# Altium PCB reservoir_level_color.PcbDoc
Units mil, origin at the board's own origin, x right, y up, seen from the top; angles counter-clockwise.
Board outline 1505 x 8250 mil, 2 copper layers (Top Layer, Bottom Layer); 10 components, 15 nets, 78 pads, 23 vias.
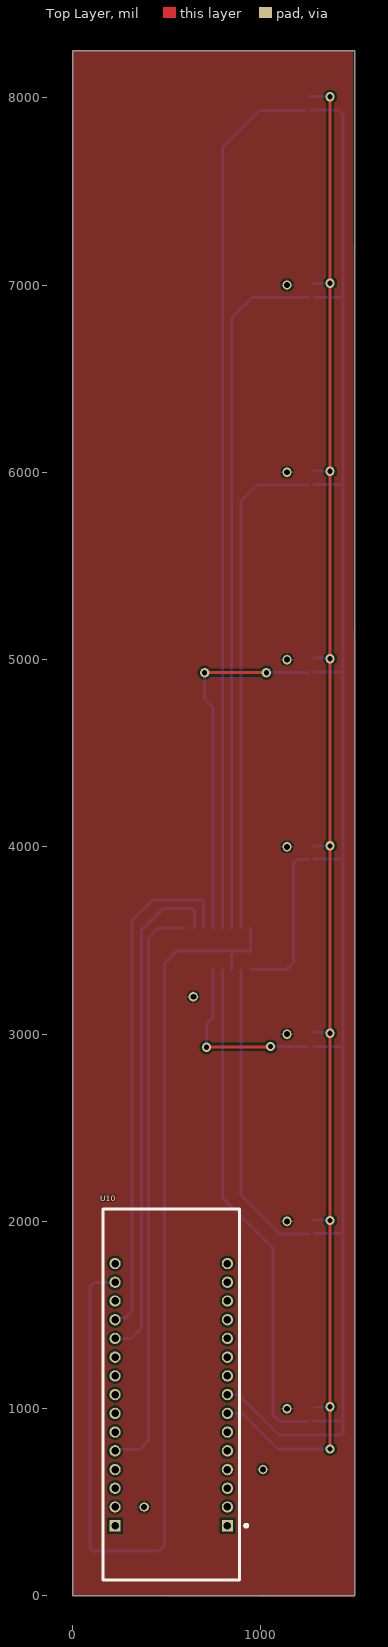
[diagram p0: Top Layer view]
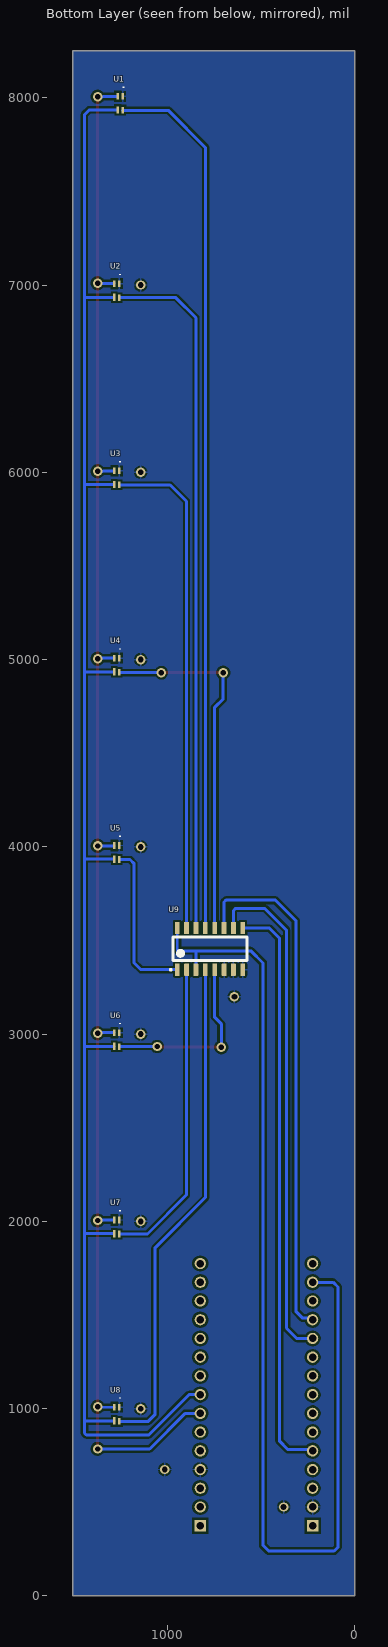
[diagram p1: Bottom Layer view, seen from below]

## Layer stack, top to bottom
Top Solder: solder mask 0.4, Solder Resist, Dk 3.5
Top Layer: signal copper 1.4
Dielectric 1: dielectric 12.6, FR-4, Dk 4.8
Bottom Layer: signal copper 1.4
Bottom Solder: solder mask 0.4, Solder Resist, Dk 3.5

## Board outline
0,0 1505,0 1505,8250 0,8250

## Design rules (kind name [scope] priority, off if disabled: settings)
Clearance [All] p1: gap=12 ignorepadtopadclearanceinfootprint=FALSE except(0: SMDPad-Hole THPad-Hole Via-Hole Fill-Hole Poly-Hole Region-Hole Text-Hole; 10: Arc-SMDPad Track-SMDPad SMDPad-SMDPad)
PolygonConnect [All] p1: connectstyle=Relief reliefconductorwidth=10 reliefentries=4 polygonreliefangle="90 Angle" airgapwidth=10
RoomDefinition reservoir_level_color [InComponentClass('reservoir_level_color')] p1: confinementstyle=ConfineIn formatcopy=TRUE lockcomponents=FALSE outline 0,0 1500.01,0 1500.01,8255 0,8255
RoutingVias [All] p1: holewidth=28 width=50 viastyle="Through Hole" minholewidth=28 minwidth=50 maxholewidth=28 maxwidth=50
SolderMaskExpansion [All] p1: expansion=4 istentingtop=FALSE
Width [All] p1: maxlimit=20 minlimit=12 preferedwidth=16 minimp=50.000000 maximp=50.000000 favimp=50.000000
30 further rules are at their usual default settings.

## Classes and differential pairs
component class reservoir_level_color: U2 U3 U4 U5 U6 U7 U8 U10

## Components (designator, comment, footprint, x,y, rotation, side; value= is the part's Value field where it differs from the comment)
U1 "VEML6040" VISHAY_VEML6040_1.25X2X1 1253,7970 r270 bottom
U2 "VEML6040" VISHAY_VEML6040_1.25X2X1 1270.72,6970 r270 bottom
U3 "VEML6040" VISHAY_VEML6040_1.25X2X1 1270.72,5970 r270 bottom
U4 "VEML6040" VISHAY_VEML6040_1.25X2X1 1270.72,4970 r270 bottom
U5 "VEML6040" VISHAY_VEML6040_1.25X2X1 1270.72,3970 r270 bottom
U6 "VEML6040" VISHAY_VEML6040_1.25X2X1 1270.72,2970 r270 bottom
U7 "VEML6040" VISHAY_VEML6040_1.25X2X1 1270.72,1970 r270 bottom
U8 "VEML6040" VISHAY_VEML6040_1.25X2X1 1270.72,970 r270 bottom
U9 "SN74LV4051ADR" D0016A_M 773,3455 r90 bottom
U10 "NUCLEO-F303K8" MODULE_NUCLEO-F303K8 525,1075 r180 top

## Footprints (in the part's own frame and the unit in brackets; to place one, negate y for a bottom-side part, rotate by r counter-clockwise, add the part's x,y. Pads: shape width x height; smd on the part's side, far side on the other; paste and mask are expansions set on the pad)
D0016A_M [mm] "SOIC, 16-Leads, Body 10x4mm, Pitch 1.27mm, IPC Low Density"
  rrect15% 1.65x0.65 smd: 1(-2.825,4.445) 2(-2.825,3.175) 3(-2.825,1.905) 4(-2.825,0.635) 5(-2.825,-0.635) 6(-2.825,-1.905) 7(-2.825,-3.175) 8(-2.825,-4.445) 9(2.825,-4.445) 10(2.825,-3.175) 11(2.825,-1.905) 12(2.825,-0.635) 13(2.825,0.635) 14(2.825,1.905) 15(2.825,3.175) 16(2.825,4.445)
  silkscreen extent -2.95,-5 1.6,5.45, body extent -3,-4.95 3,4.95, height 1.59
MODULE_NUCLEO-F303K8 [mm]
  rect 1.53x1.53 hole 1.02: 3_1(-7.62,17.78) 4_1(7.62,17.78)
  round 1.53 hole 1.02: 3_2(-7.62,15.24) 3_3(-7.62,12.7) 3_4(-7.62,10.16) 3_5(-7.62,7.62) 3_6(-7.62,5.08) 3_7(-7.62,2.54) 3_8(-7.62,0) 3_9(-7.62,-2.54) 3_10(-7.62,-5.08) 3_11(-7.62,-7.62) 3_12(-7.62,-10.16) 3_13(-7.62,-12.7) 3_14(-7.62,-15.24) 3_15(-7.62,-17.78) 4_2(7.62,15.24) 4_3(7.62,12.7) 4_4(7.62,10.16) 4_5(7.62,7.62) 4_6(7.62,5.08) 4_7(7.62,2.54) 4_8(7.62,0) 4_9(7.62,-2.54) 4_10(7.62,-5.08) 4_11(7.62,-7.62) 4_12(7.62,-10.16) 4_13(7.62,-12.7) 4_14(7.62,-15.24) 4_15(7.62,-17.78)
  silkscreen extent -10.36,-25.14 9.27,25.14
VISHAY_VEML6040_1.25X2X1 [mm]
  rect 0.9x0.35 smd: 1(-0.95,0.35) 2(-0.95,-0.35) 4(0.95,0.35)
  rect 1x0.35 smd: 3(0.9,-0.35)
  silkscreen extent -2.25,0.4 -2.15,0.5

## Part data
U1 U2 U3 U4 U5 U6 U7 U8: "<b>VEML6040</b>  <p> RGBW Color Sensor with I2C Interface: <ul>   VEML6040 color sensor senses red, green, blue, and white light and incorporates photodiodes, amplifiers, and analog / digital circuits into a single chip using CMOS process. With the color sensor applied, the brightness, and color temperature of backlight can be adjusted base on ambient light source that makes panel looks more comfortable for end userâ€™s eyes. VEML6040â€™s adoption of FiltronTM technology achieves the closest ambient light spectral sensitivity to real human eye responses.  <ul> Device Model created 15.06.2016 by Johannes Kolb - Vishay Semiconductor GmbH", Package=None, Availability=Unavailable, MF="{'manufacturer': u'Vishay'}", MP=VEML6040, Price=None
U9: library part CMP-0802-00006-4, "8-Channel Analog Multiplexer/Demultiplexer, D0016A, LARGE T&R", Generic Part Number=SN74LV4051A, Manufacturer="Texas Instruments", Operating Temperature Range(C)="-40 to 85", Rating=Catalog, Bandwidth(Max)(MHz)=35, Code_JEDEC="MS-012 variation AC", Configuration="1 X 1：8 MUX", Crosstalk=Yes, DatasheetVersion=SCLS428H, Output Type=CMOS, PackageReference=D0016A, PackageVersion=http://www.ti.com/lit/ml/mpds178g/mpds178g.pdf, Ron(Max)(Ohms)=75, Ron(Typ)(Ohms)=22, VCC(Max)(V)=5.5, VCC(Min)(V)=2
U10: Package=None, Availability=Unavailable, MF="{'manufacturer': u'STMicroelectronics'}", MP=NUCLEO-F303K8, Price=None

## Via types
v1: diameter 50, hole 28, Top Layer to Bottom Layer, 13 vias
v2: diameter 50, hole 31, Top Layer to Bottom Layer, 10 vias

## Nets (pads, with @x,y where several pads share a name; then routed paths per layer and width w, separated by ;. In a path a pad name is that pad's centre, name@x,y a point inside that pad or via, vN(x,y) a via of type N, cw(c..) or ccw(c..) an arc to the next point about the centre after c; other vN are vias at no path point)
Enable1: U1.4 U9.13 | length 4691.8
  Bottom Layer w16: U9.13 798,7735 995.6,7932.6 U1.4
Enable2: U2.4 U9.14 | length 3712.3
  Bottom Layer w16: U9.14 848,6825 955.6,6932.6 U2.4
Enable3: U3.4 U9.15 | length 2674
  Bottom Layer w16: U9.15 898,5845 985.6,5932.6 U3.4
Enable4: U4.4 U9.12 | length 1933.5
  Top Layer w16: v1(703,4930) v1(1033,4930)
  Bottom Layer w16: v1(703,4930) 703,4790 748,4745 U9.12@748,3567.2 ; v1(1033,4930) U4.4@1255.05,4930
Enable5: U5.4 U9.1 | length 863.3
  Bottom Layer w16: U9.1 1141.78,3343.78 1178,3380 1178,3910 1200.6,3932.6 U5.4
Enable6: U6.4 U9.5 | length 972.9
  Top Layer w16: v1(713,2930) 715.5,2932.5 1053.7,2932.5 v1(1055,2933.8)
  Bottom Layer w16: v1(713,2930) 713,3055 748,3090 U9.5 ; v1(1055,2933.8) 1055.6,2933.2 U6.4@1255.83,2933.2
Enable7: U7.4 U9.2 | length 1647.5
  Bottom Layer w16: U9.2 898,2142 1107.4,1932.6 U7.4
Enable8: U8.4 U9.4 | length 2689.9
  Bottom Layer w16: U9.4 798,2127 1068,1857 1068,967 1102.4,932.6 U8.4@1255,932.6
GND: U1.1 U2.1 U3.1 U4.1 U5.1 U6.1 U7.1 U8.1 U9.6 U9.7 U9.8 U10.3_4 U10.4_2
  other v2: 380,475 1015,675 1143,1000 1143,2000 1143,3000 643,3200 1143,4000 1143,5000 1143,6000 1143,7000
SCL: U1.3 U2.3 U3.3 U4.3 U5.3 U6.3 U7.3 U8.3 U10.3_8 | length 9032
  Bottom Layer w16: U10.3_8 885,1075 1100,860 1433.63,860 1443,869.37 1443,934.57 ; U1.3@1268,7934.57 1418,7934.57 1443,7909.57 1443,6934.57 ; U8.3 1443,934.57 ; U6.3 1443,2934.57 ; U4.3 1443,4934.57 ; U7.3@1288,1934.57 1443,1934.57 ; U5.3@1288,3934.57 1443,3934.57 ; U3.3@1288,5934.57 1443,5934.57 ; U2.3@1288,6934.57 1443,6934.57 ; 1443,934.57 1443,1934.57 ; 1443,1934.57 1443,2934.57 ; 1443,2934.57 1443,3934.57 ; 1443,3934.57 1443,4934.57 ; 1443,4934.57 1443,5934.57 ; 1443,5934.57 1443,6934.57
SDA: U1.2 U2.2 U3.2 U4.2 U5.2 U6.2 U7.2 U8.2 U10.3_7 | length 8516.4
  Top Layer w16: v1@1360.5,7992.5 1373,7980 v1(1373,7010) v1(1373,6005) v1(1373,5005) v1(1373,4005) v1(1373,3005) v1(1373,2005) v1(1373,1010) v1(1373,785)
  Bottom Layer w12: U8.2 v1@1373,1007.4
  Bottom Layer w16: U10.3_7 905,975 1095,785 v1(1373,785) ; U1.2 1345.6,8007.4 v1@1348,8005 ; U7.2 v1@1373,2007.4 ; U6.2 v1@1373,3007.4 ; U4.2 v1@1373,5007.4 ; U3.2 1345.6,6007.4 v1@1348,6005 ; U2.2 1284.5,7007.59 1285.61,7008.7 1371.7,7008.7 v1(1373,7010) ; U5.2@1286.39,4005 v1(1373,4005)
  other v1: 1373,8005
SEL0: U9.11 U10.4_12 | length 2766.7
  Bottom Layer w16: U10.4_12 233.46,1483.46 278.46,1483.46 315,1520 315,3607 423,3715 688.63,3715 698,3705.63 U9.11
SEL1: U9.10 U10.4_11 | length 2716.7
  Bottom Layer w16: U10.4_11 310,1375 365,1430 365,3555 480,3670 638.63,3670 648,3660.63 U9.10
SEL2: U9.9 U10.4_5 | length 3102
  Bottom Layer w16: U10.4_5 231.12,781.12 356.12,781.12 403,828 403,3513 456.22,3566.22 U9.9
VCC: U9.3 U9.16 U10.4_14 | length 5773.4
  Bottom Layer w16: U10.4_14 115,1675 90,1650 90,260 110,240 460,240 490,270 490,3380 555,3445 848,3445 ; U9.3 848,3445 ; U9.16 948,3445 848,3445
pads on no net: U10.3_1 U10.3_2 U10.3_3 U10.3_5 U10.3_6 U10.3_9 U10.3_10 U10.3_11 U10.3_12 U10.3_13 U10.3_14 U10.3_15 U10.4_1 U10.4_3 U10.4_4 U10.4_6 U10.4_7 U10.4_8 U10.4_9 U10.4_10 U10.4_13 U10.4_15

## Polygon pours and split planes (outlines as drawn)
GND on Bottom Layer "GND_L02_P000" (solid, pour order 0): 0,0 0,8250 1505,8250 1505,0
GND on Top Layer "GND_L01_P001" (solid, pour order 1): 0,0 0,8250 1495.01,8250 1505.01,-6